# Altium PCB PCB.PcbDoc
Units mm, origin at the board's own origin, x right, y up, seen from the top; angles counter-clockwise.
Board outline 38 x 38 mm, 2 copper layers (Top Layer, Bottom Layer); 22 components, 13 nets, 73 pads, 63 vias.
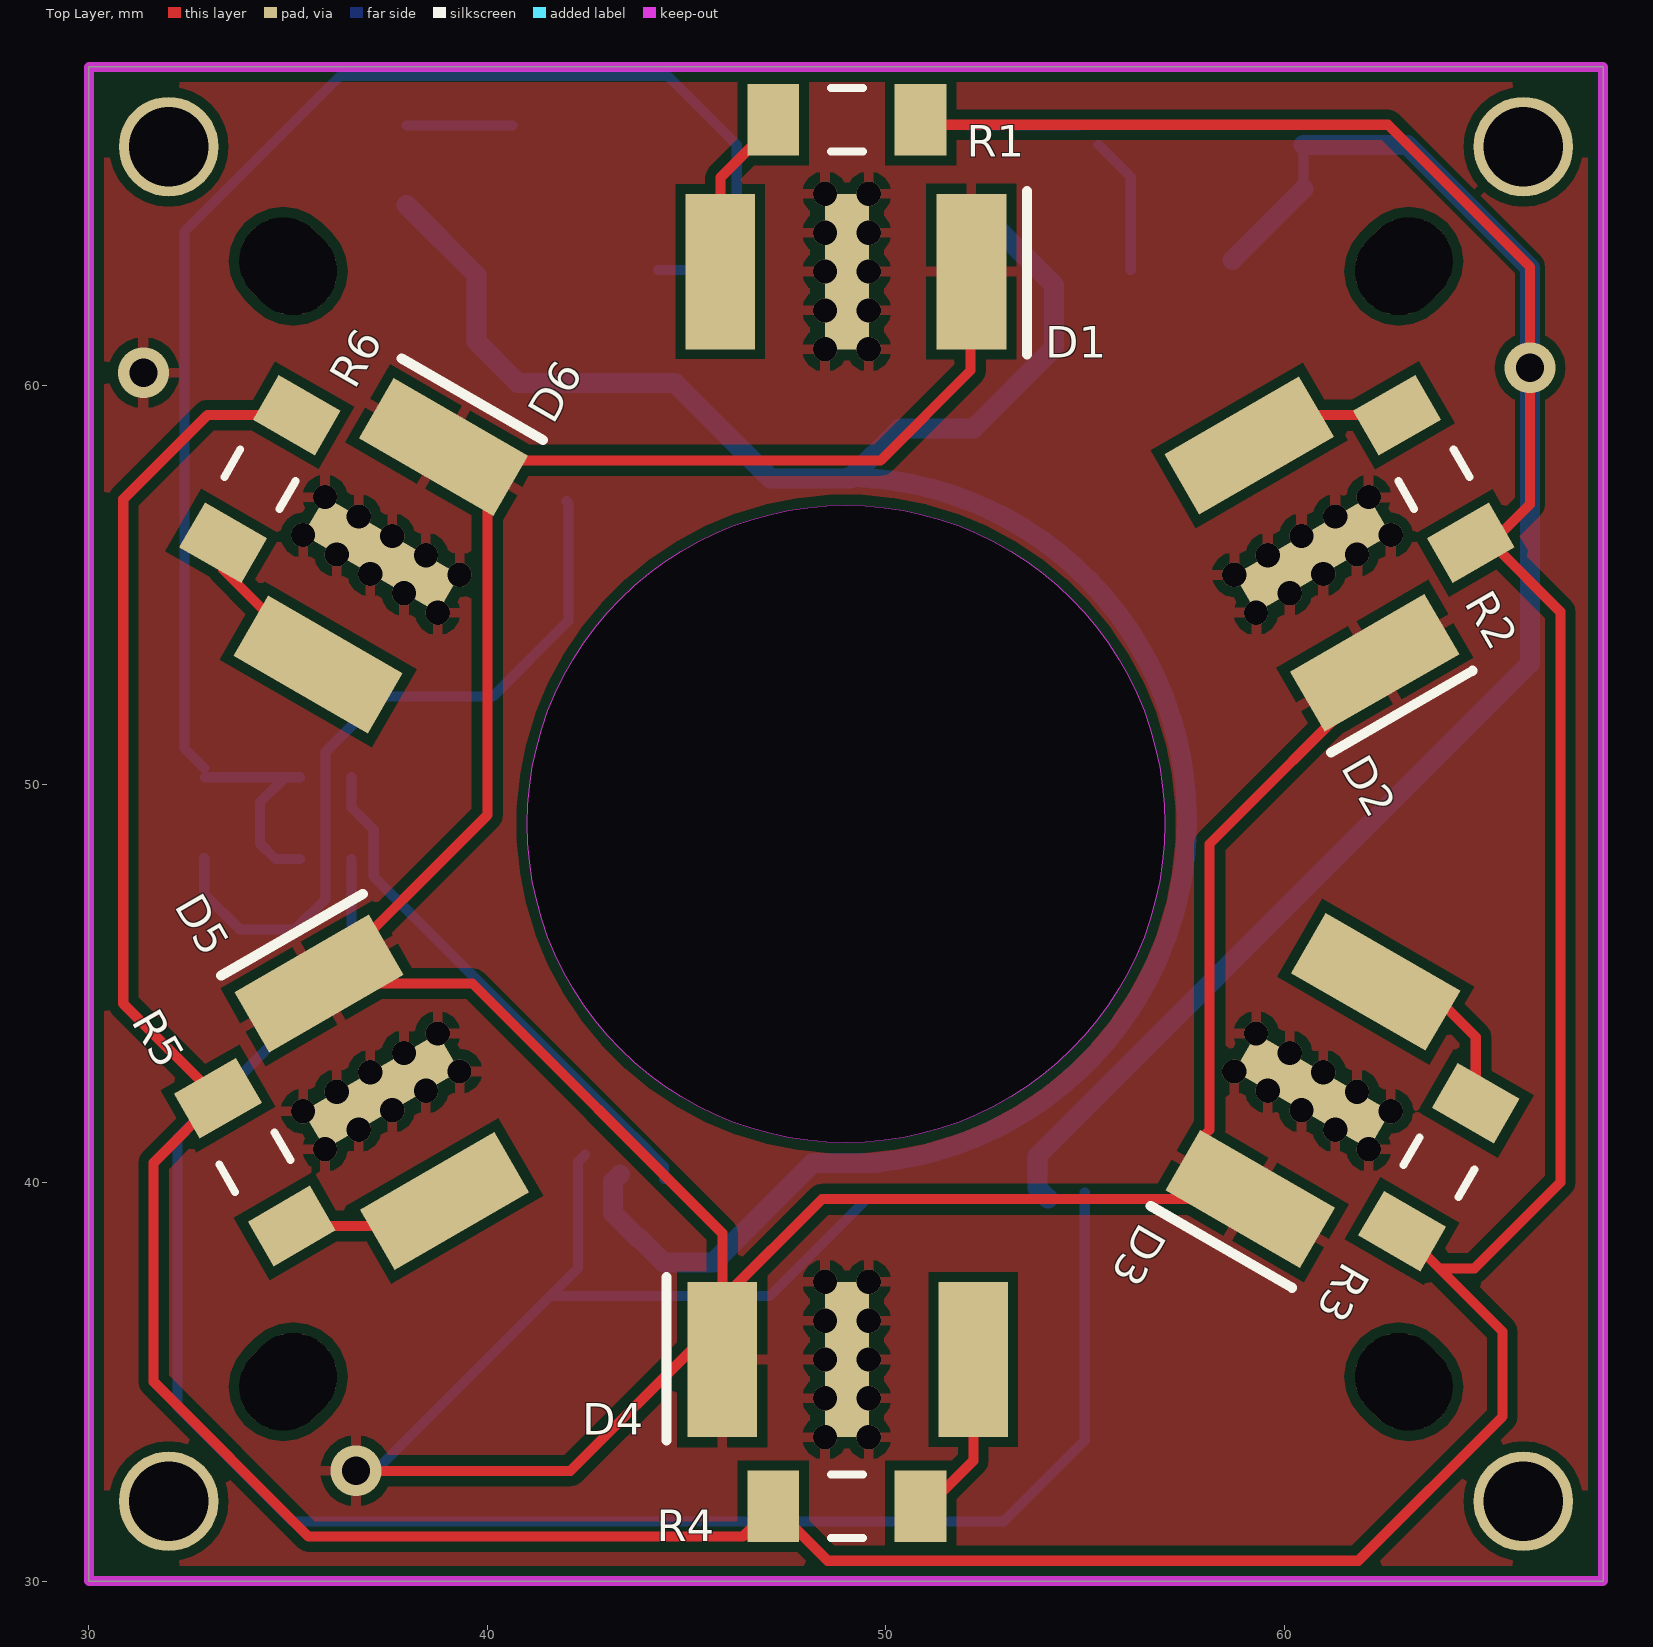
[diagram p0: Top Layer view]
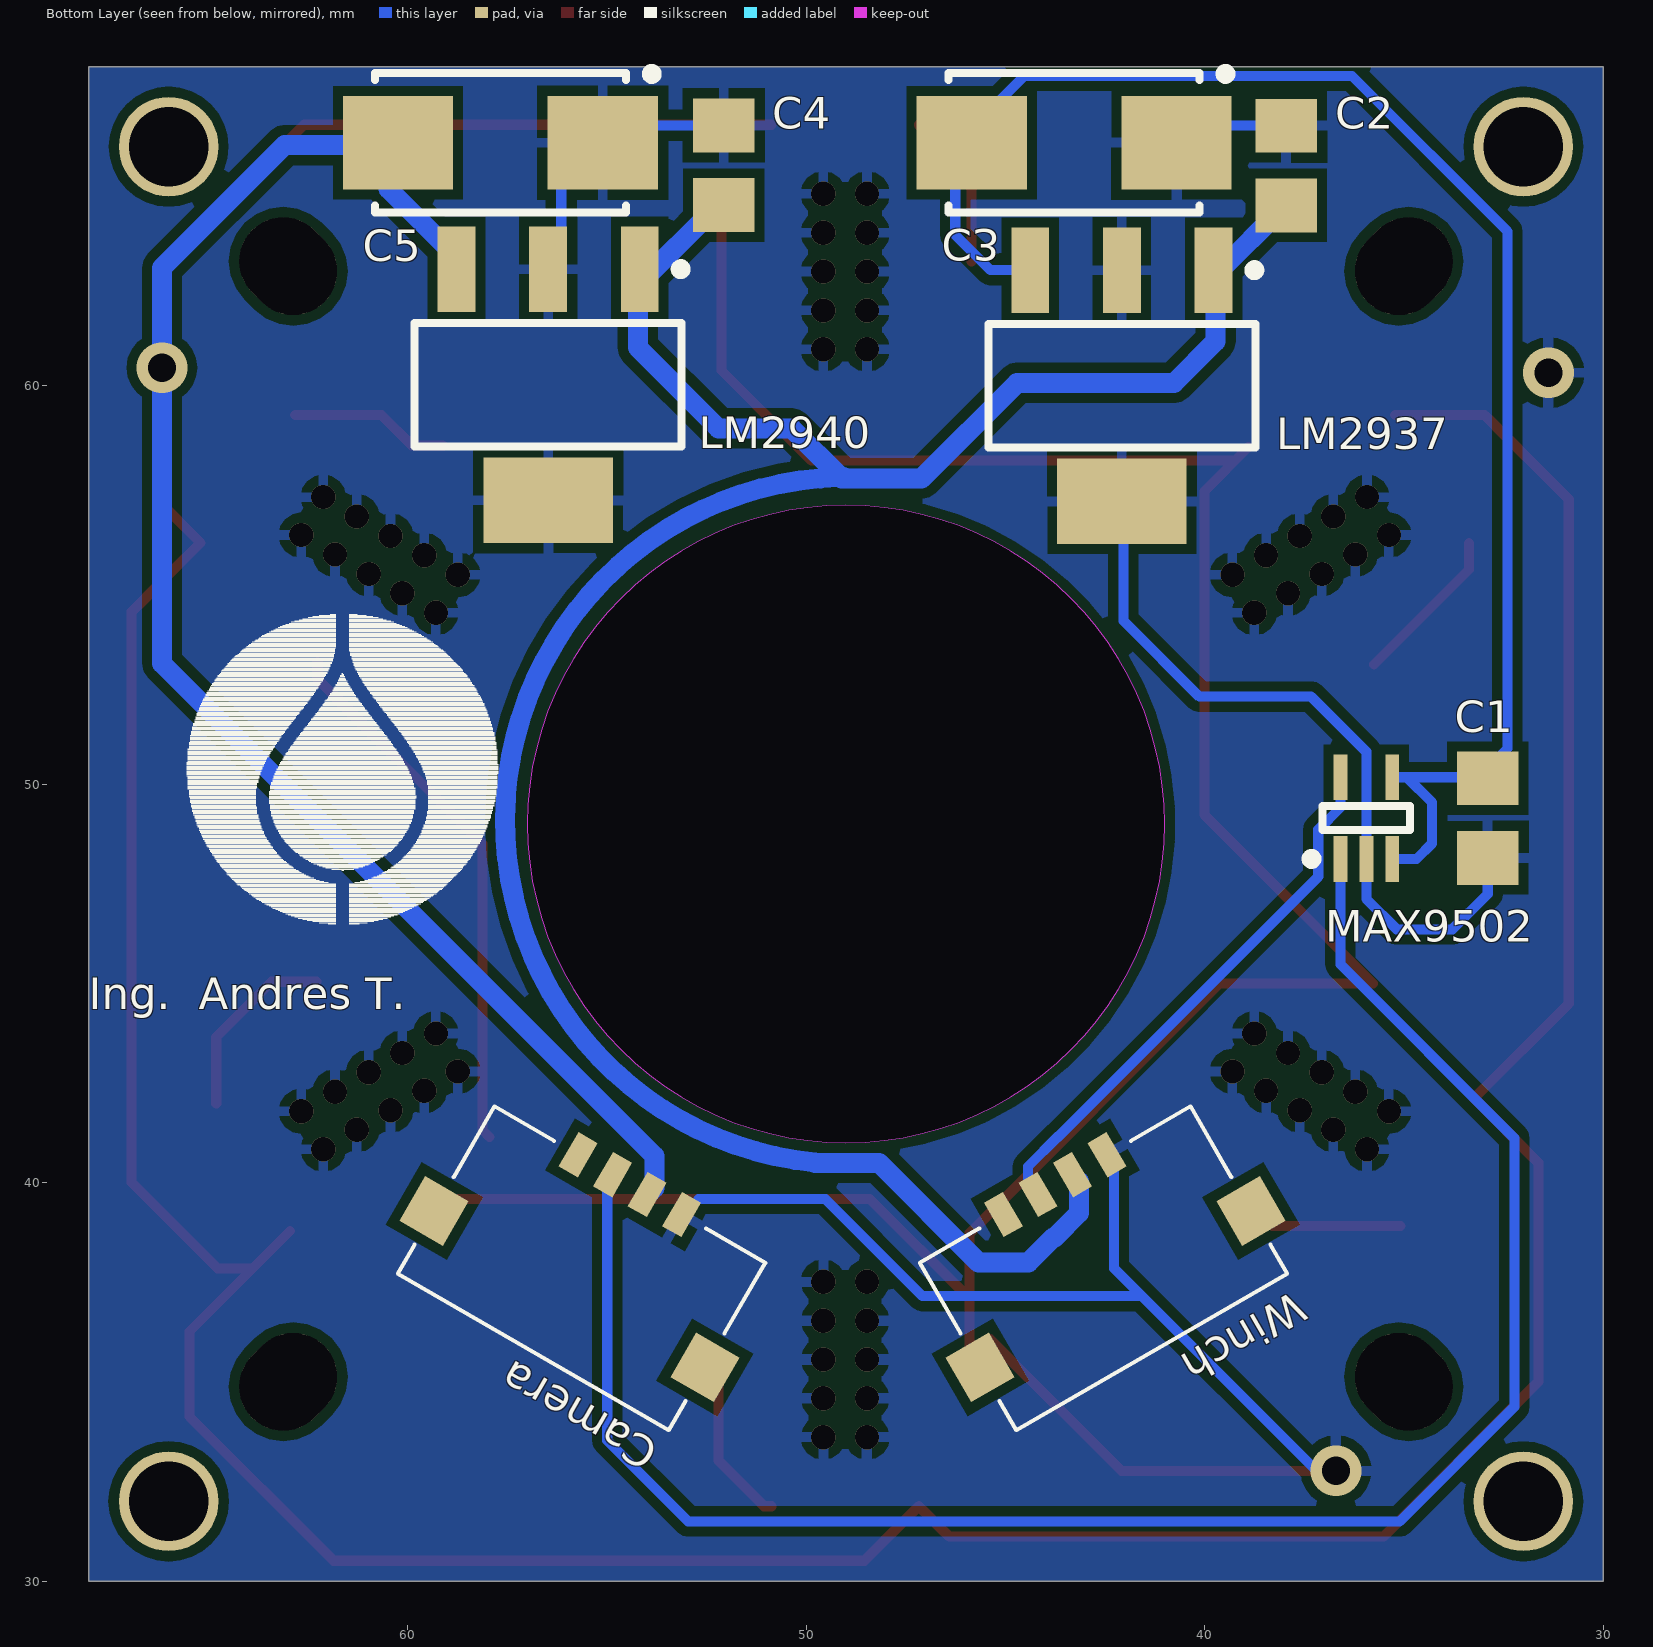
[diagram p1: Bottom Layer view, seen from below]
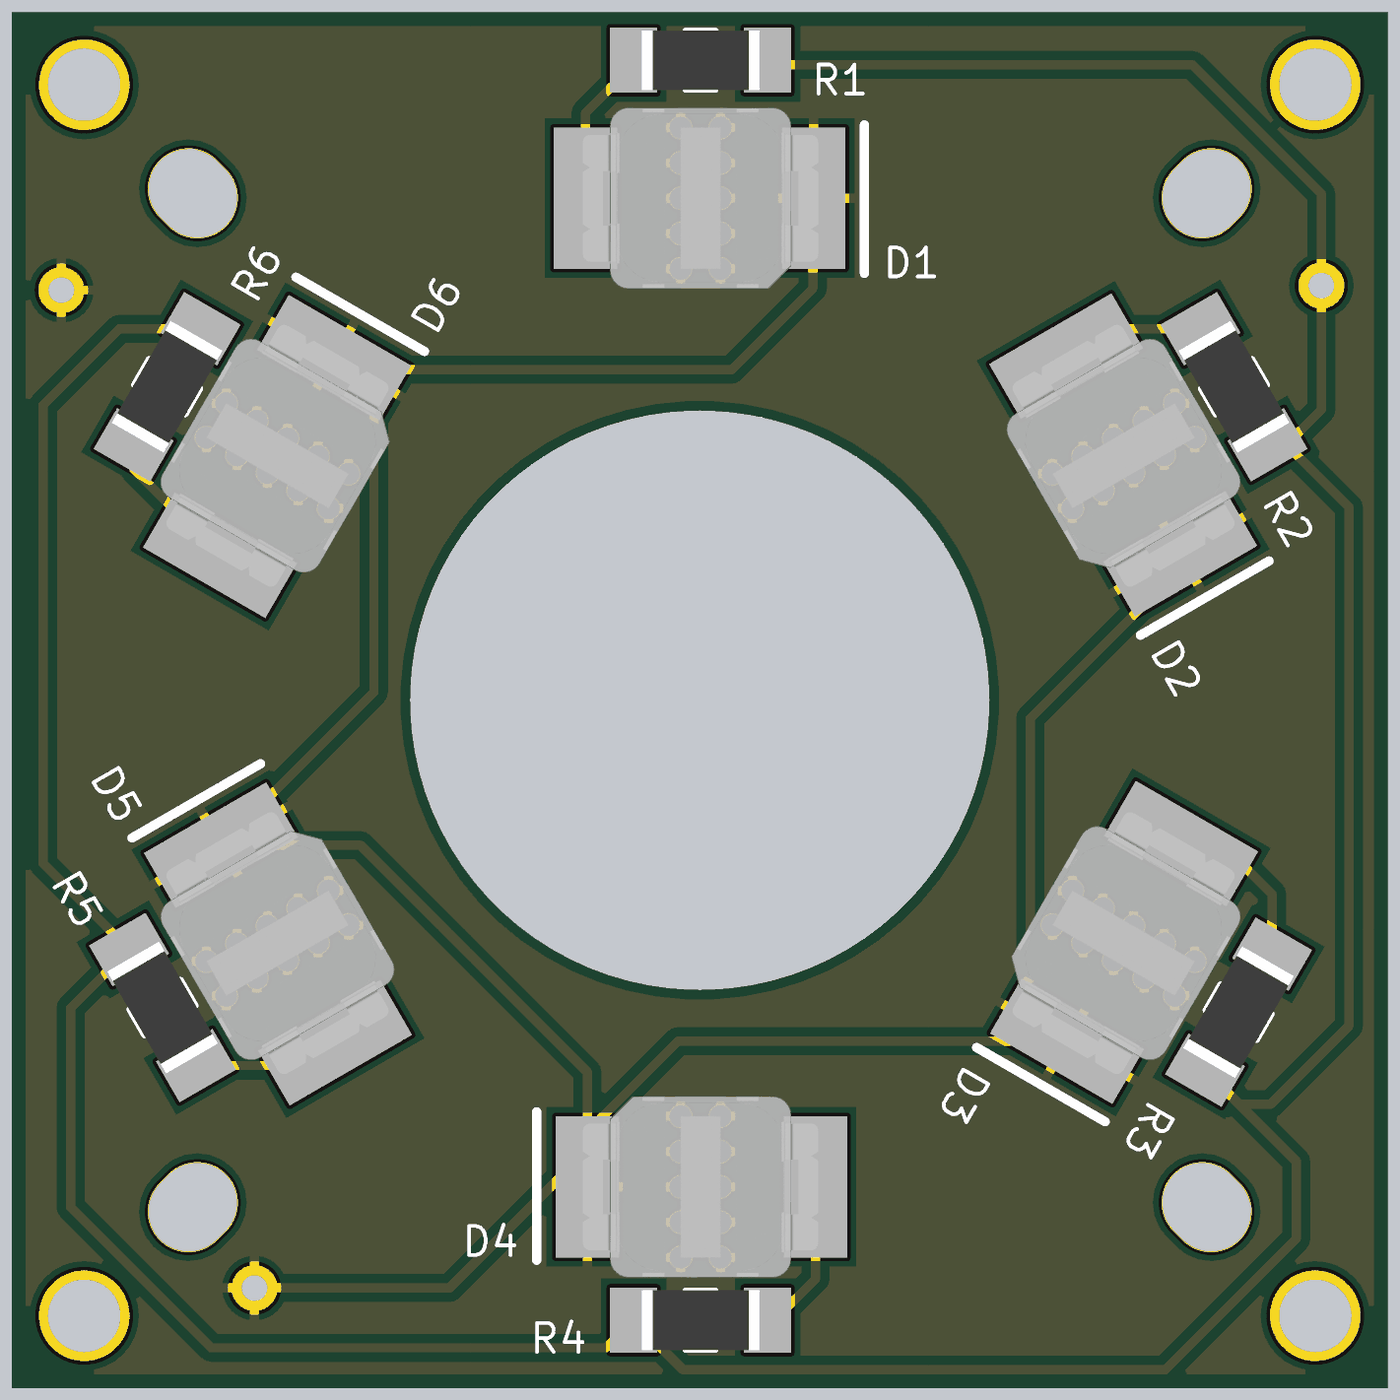
[diagram p2: 3D render of the assembled board from above, using the file's embedded part models]
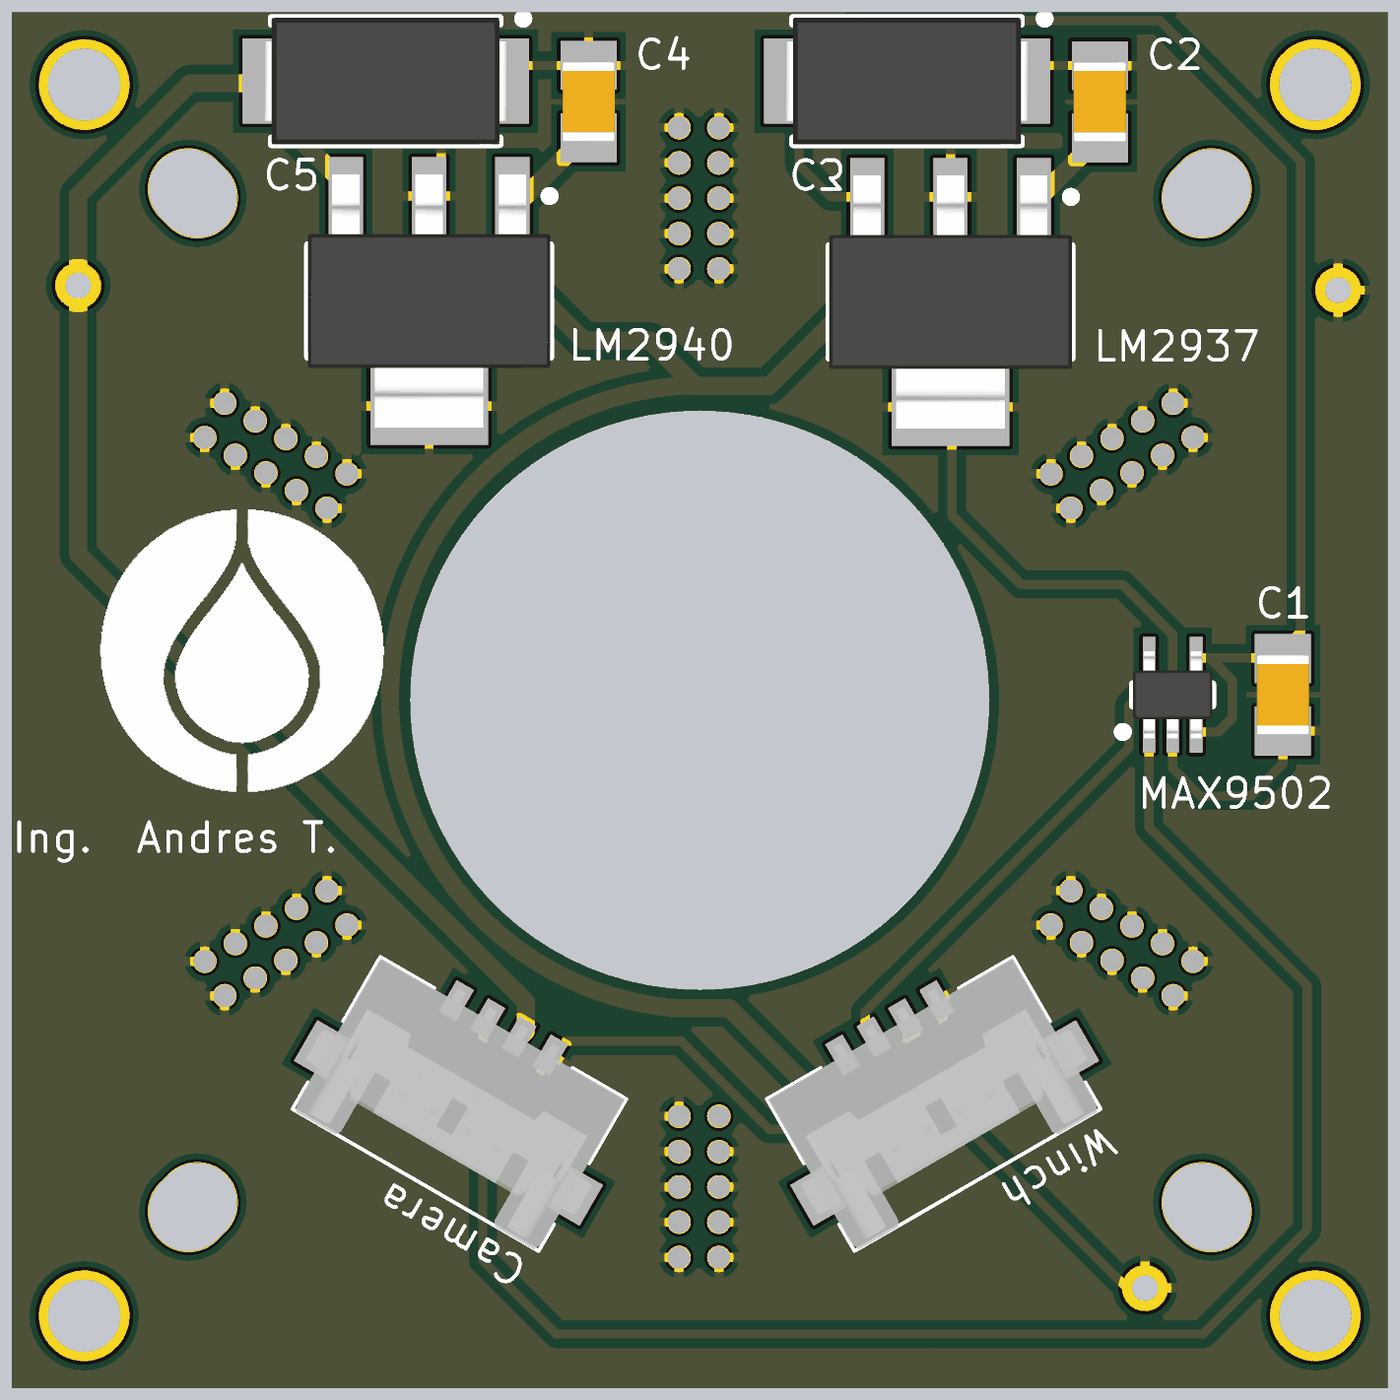
[diagram p3: 3D render of the assembled board from below, using the file's embedded part models]

## Layer stack, top to bottom
Top Solder: solder mask 0.0102, Solder Resist, Dk 3.5
Top Layer: signal copper 0.0356
Dielectric 1: dielectric 0.32, FR-4, Dk 4.8
Bottom Layer: signal copper 0.0356
Bottom Solder: solder mask 0.0102, Solder Resist, Dk 3.5

## Board outline
30,30 30,68 68,68 68,30
cut-out: 49,41 cw(c49,49) 41,49 cw(c49,49) 49,57 cw(c49,49) 57,49 cw(c49,49)

## Design rules (kind name [scope] priority, off if disabled: settings)
Clearance [All] p1: gap=0.254
HoleSize [All] p1: absolutevalues=TRUE maxlimit=2.55 minlimit=0.025 maxpercent=80.000 minpercent=20.000
MinimumSolderMaskSliver MinimumSolderMaskSliver_3 [HasFootprint('MOLEX_4CIRCUITS')] p1: minsoldermaskwidth=0.24
MinimumSolderMaskSliver MinimumSolderMaskSliver_2 [HasFootprint('LED_NeutralWhite - 24mils')] p2: minsoldermaskwidth=0.145
MinimumSolderMaskSliver [HasFootprint('SOT65P210X110-5N')] p3: minsoldermaskwidth=0.095
MinimumSolderMaskSliver MinimumSolderMaskSliver_1 [All] p4: minsoldermaskwidth=0.254
PolygonConnect [All] p1: connectstyle=Relief reliefconductorwidth=0.254 reliefentries=4 polygonreliefangle="90 Angle" airgapwidth=0.254
RoutingVias [All] p1: holewidth=0.711 width=1.27 viastyle="Through Hole" minholewidth=0.711 minwidth=1.27 maxholewidth=0.711 maxwidth=1.27
ShortCircuit [InNet('No Net')] p1: allowed=TRUE
ShortCircuit ShortCircuit_1 [All] p2: allowed=FALSE
SilkToSolderMaskClearance SilkToSolderMaskClearance_3 [HasFootprint('SOT223_LM2940')] p1: minsilkscreentomaskgap=0.073 clearancetoexposedcopper=TRUE
SilkToSolderMaskClearance SilkToSolderMaskClearance_2 [HasFootprint('SOT223127P600-8N')] p2: minsilkscreentomaskgap=0.073 clearancetoexposedcopper=TRUE
SilkToSolderMaskClearance [HasFootprint('SOT65P210X110-5N')] p3: minsilkscreentomaskgap=0 clearancetoexposedcopper=TRUE
SilkToSolderMaskClearance SilkToSolderMaskClearance_1 [All] p4: minsilkscreentomaskgap=0.254 clearancetoexposedcopper=TRUE
SolderMaskExpansion [All] p1: expansion=0.102
Width [All] p1: maxlimit=1.5 minlimit=0.254 preferedwidth=0.254 toplayer_maxwidth=0.5 minimp=50.000000 maximp=50.000000 favimp=50.000000
26 further rules are at their usual default settings.

## Components (designator, comment, footprint, x,y, rotation, side; value= is the part's Value field where it differs from the comment)
C1 "C0805" CAP_KEMET0.1UF 32.893,49.149 r270 bottom
C2 "Cap Pol1" CAP_KEMET 37.95,65.525 r90 bottom
C3 "Cap Pol1" CAPM6032 43.275,66.1 r180 bottom
C4 "Cap Pol1" CAP_KEMET 52.07,65.532 r90 bottom
C5 "Cap Pol1" CAPM6032 57.675,66.1 r180 bottom
Camera "Header 3" MOLEX_4CIRCUITS 54.425,39.95 r30 bottom
D1 "LED3" "LED_NeutralWhite - 24mils" 49.022,62.865 r0 top
D2 "LED3" "LED_NeutralWhite - 24mils" 60.706,55.753 r300 top
D3 "LED3" "LED_NeutralWhite - 24mils" 60.706,42.291 r240 top
D4 "LED3" "LED_NeutralWhite - 24mils" 49.022,35.56 r180 top
D5 "LED3" "LED_NeutralWhite - 24mils" 37.338,42.291 r120 top
D6 "LED3" "LED_NeutralWhite - 24mils" 37.338,55.753 r60 top
LM2937 "LM2937" SOT223127P600-8N 42.075,60 r270 bottom
LM2940 "Voltage Reg" SOT223_LM2940 56.475,60.025 r270 bottom
MAX9502 "MAX9502" SOT65P210X110-5N 35.941,49.149 r90 bottom (schematic designator *)
R1 "Res1" RESC3216 49.022,66.675 r180 top
R2 "Res1" RESC3216 63.754,57.658 r120 top
R3 "Res1" RESC3216 63.881,40.386 r60 top
R4 "Res1" RESC3216 49.022,31.877 r0 top
R5 "Res1" RESC3216 34.163,40.513 r300 top
R6 "Res1" RESC3216 34.29,57.658 r240 top
Winch "Header 4" MOLEX_4CIRCUITS 43.75,39.95 r330 bottom

## Footprints (in the part's own frame and the unit in brackets; to place one, negate y for a bottom-side part, rotate by r counter-clockwise, add the part's x,y. Pads: shape width x height; smd on the part's side, far side on the other; paste and mask are expansions set on the pad)
CAP_KEMET [mm] "0.1uF, 0.47 uF"
  rect 1.35x1.55 smd: 1(-1,0) 2(1,0)
  body extent -1.1,-0.72 1.1,0.72, height 0.9
CAP_KEMET0.1UF [mm]
  rect 1.35x1.55 smd: 1(-1,0) 2(1,0)
  body extent -1.1,-0.72 1.1,0.72, height 0.9
CAPM6032 [mm]
  rect 2.77x2.35 smd: 1(-2.57,0) 2(2.57,0)
  silkscreen extent -3.15,-1.75 3.92,1.85, body extent -3.37,-1.75 3.37,1.75, height 2.8
"LED_NeutralWhite - 24mils" [mm] "LED XLAMP NEUTRAL WHT 4000K 2SMD"
  rect 1.75x3.9 smd: 1(-3.175,0) 2(3.125,0)
  rect 1.1x3.9 smd: ""(0,0)
  silkscreen extent 4.52,-2.08 4.52,2.02, body extent -3.25,-2.5 3.25,2.5, height 1.35
MOLEX_4CIRCUITS [mm]
  rect 0.55x1 smd: 1(1.5,0) 2(0.5,0) 3(-0.5,0) 4(-1.5,0)
  rect 1.26x1.3 smd: ""(-3.925,3.03) ""(3.925,3.03)
  silkscreen extent -3.93,0 3.93,4.85, body extent -4.3,-0.31 4.3,4.88, height 1.48
RESC3216 [mm] "Chip Resistor, 2-Leads, Body 3.13x1.55mm, IPC Medium Density"
  rect 1.3x1.8 smd: 1(-1.85,0) 2(1.85,0)
  silkscreen extent -0.4,-0.8 0.4,0.8, body extent -1.63,-0.82 1.63,0.82, height 0.7
SOT65P210X110-5N [mm] "SOT23, 5-Leads, Body 2,00x2,10mm, Pitch 0,65mm, IPC Medium Density"
  rect 1.15x0.35 smd: 1(-1.025,0.65) 2(-1.025,0) 3(-1.025,-0.65) 4(1.025,-0.65) 5(1.025,0.65)
  silkscreen extent -1.15,-1.1 0.3,1.5, body extent -1.2,-1.1 1.2,1.1, height 1.1
SOT223_LM2940 [mm] "SOT223, 4-Leads, Body 6.50x7.00mm (avg), Pitch 2.30mm, IPC Medium Density"
  rect 2.15x0.95 smd: 1(-2.9,2.3) 2(-2.9,0) 3(-2.9,-2.3)
  rect 2.15x3.25 smd: 4(2.9,0)
  silkscreen extent -3.02,-3.35 1.55,3.45, body extent -3.5,-3.35 3.5,3.35, height 1.8
SOT223127P600-8N [mm] "LM2937"
  rect 2.15x0.95 smd: 1(-2.9,2.3) 2(-2.9,0) 3(-2.9,-2.3)
  rect 2.15x3.25 smd: 4(2.9,0)
  silkscreen extent -3.02,-3.35 1.55,3.45, body extent -3.5,-3.35 3.5,3.35, height 1.7

## Part data
C1: "Ceramic Chip Capacitor - Standard"
C2 C3 C4 C5: "Polarized Capacitor (Radial)"
Camera: library part "Header 4", "Header, 4-Pin"
D1 D2 D3 D4 D5 D6: "Typical BLUE SiC LED"
LM2937: library part LM1117
R1 R2 R3 R4 R5 R6: "Resistor"
Winch: "Header, 4-Pin"

## Free pads (board coordinates)
  round 2.5 hole 2: 0(32,32) 0(32,66) 0(66,32) 0(66,66)
  oval 2.55x2.2 hole 2.2 slot 2.55 at 45 deg rot 45: ""(35,35) ""(63,63)
  oval 2.55x2.2 hole 2.2 slot 2.55 at 135 deg rot 135: ""(35,63) ""(63,35)

## Via types
v1: diameter 0.61, hole 0.61, Top Layer to Bottom Layer, 60 vias
v2: diameter 1.27, hole 0.711, Top Layer to Bottom Layer, 3 vias

## Nets (pads, with @x,y where several pads share a name; then routed paths per layer and width w, separated by ;. In a path a pad name is that pad's centre, name@x,y a point inside that pad or via, vN(x,y) a via of type N, cw(c..) or ccw(c..) an arc to the next point about the centre after c; other vN are vias at no path point)
GND: C1.2 C2.2 C3.2 C4.2 C5.2 Camera.4 D1. D1.2 D2. D2.2 D3. D3.2 D4. D4.2 D5. D5.2 D6. D6.2 LM2937.2 LM2937.4 LM2940.2 LM2940.4 MAX9502.2 Winch.4 | length 139.2
  Top Layer w0.254: v2(36.703,32.766) 42.087,32.766 45.389,36.068 D4.2 D4.2@45.897,37.084 ; D1.2@52.125,64.588 52.125,60.38 49.87,58.125 39.235,58.125 D6.2 40,57.36 40,49.222 D5.2 39.628,44.997 45.897,38.728 D4.2@45.897,37.084 ; D3.2@57.95,41.147 58.125,41.322 58.125,48.5 62.269,52.644 D2.2 ; D3.2 48.398,39.585 D4.2@45.897,37.084
  Bottom Layer w0.254: C1.2 32.893,47.244 33.782,46.355 35.179,46.355 35.941,47.117 MAX9502.2 35.941,50.813 37.325,52.197 40.132,52.197 42.037,54.102 42.037,57.044 LM2937.4@41.981,57.1 ; v2(36.703,32.766) 37.191,32.766 42.275,37.85 42.275,40.524 Winch.4 ; C2.2@37.973,66.532 C3.2@40.626,66.532 ; 41.675,37.15 47.08,37.15 49.52,39.59 52.701,39.59 ; C4.2 C5.2@54.85,66.532 ; C5.2@55.342,66.04 56.146,65.236 LM2940.2@56.146,62.9
  other v1: 48.472,33.61 49.572,33.61 48.472,34.585 49.572,34.585 48.472,35.56 49.572,35.56 48.472,36.535 49.572,36.535 48.472,37.51 49.572,37.51 35.924,40.84 62.12,40.84 36.769,41.327 61.275,41.327 35.374,41.792 62.67,41.792 37.613,41.815 60.431,41.815 36.219,42.28 38.457,42.302 59.587,42.302 61.825,42.28 37.063,42.767 60.981,42.767 39.302,42.79 58.742,42.79 37.907,43.255 60.137,43.255 38.752,43.742 59.292,43.742 38.752,54.302 59.292,54.302 37.907,54.789 60.137,54.789 39.302,55.254 58.742,55.254 37.063,55.277 60.981,55.277 36.219,55.764 38.457,55.742 59.587,55.742 61.825,55.764 37.613,56.229 60.431,56.229 35.374,56.252 62.67,56.252 36.769,56.717 61.275,56.717 35.924,57.204 62.12,57.204 48.472,60.915 49.572,60.915 48.472,61.89 49.572,61.89 48.472,62.865 49.572,62.865 48.472,63.84 49.572,63.84 48.472,64.815 49.572,64.815
  other v2: 31.369,60.325
NetD1_1: D1.1 R1.2 | length 4
  Top Layer w0.254: D1.1@45.847,63.119 45.847,65.223 R1.2@47.172,66.548
NetD2_1: D2.1 R2.2 | length 4
  Top Layer w0.254: D2.1 59.9,58.503 60.657,59.26 R2.2
NetD3_1: D3.1 R3.2 | length 4.8
  Top Layer w0.254: D3.1 63.417,45.041 64.806,43.652 R3.2
NetD4_1: D4.1 R4.2 | length 4.3
  Top Layer w0.254: R4.2 51.054,31.877 52.197,33.02 D4.1
NetD5_1: D5.1 R5.2 | length 3.2
  Top Layer w0.254: R5.2 D5.1@38.295,38.911
NetD6_1: D6.1 R6.2 | length 4
  Top Layer w0.254: R6.2 33.365,55.389 D6.1
Thermal: 
VCC_3.3V: C1.1 C3.1 LM2937.3 MAX9502.3 MAX9502.4 | length 39.9
  Bottom Layer w0.254: C1.1@32.893,50.403 32.4,50.896 32.4,63.875 36.3,67.775 44.523,67.775 46.258,66.04 46.258,63.784 45.374,62.9 LM2937.3@44.281,62.9 ; C1.1@32.918,50.174 34.925,50.174 ; MAX9502.3 34.68,48.124 34.29,48.514 34.29,49.539 34.925,50.174 ; MAX9502.4 34.925,50.174
VCC_12V: C5.1 Camera.3 LM2940.3 R1.1 R2.1 R3.1 R4.1 R5.1 R6.1 | length 157.9
  Top Layer w0.254: R6.1 32.971,59.26 30.861,57.15 30.861,44.492 R5.1 31.623,40.5 31.623,35.002 35.51,31.115 46.41,31.115 R4.1 48.541,30.508 61.858,30.508 65.475,34.125 65.475,36.265 R3.1 63.894,37.846 64.77,37.846 66.929,40.005 66.929,54.327 65.2,56.056 66.167,57.023 v2(66.167,60.452) 66.167,62.983 62.602,66.548 R1.1@50.872,66.548
  Bottom Layer w0.254: C5.1@60.482,64.936 C5.1@60.482,66.04
  Bottom Layer w0.5: Camera.3@54.067,39.6 53.805,39.862 53.805,40.668 66.167,53.03 v2(66.167,60.452) 66.167,62.958 63.085,66.04 C5.1@60.482,66.04 ; LM2940.3@58.698,63.152 C5.1@60.482,64.936
VCC_IN: C2.1 C4.1 LM2937.1 LM2940.1 Winch.3 | length 61.2
  Bottom Layer w0.32: 49.023,57.635 cw(c48.938,49.085) 49.066,57.635
  Bottom Layer w0.5: C2.1@37.973,64.532 39.725,62.78 39.725,61.113 40.767,60.071 44.704,60.071 47.1,57.675 49.106,57.675 50.359,58.928 52.197,58.928 54.225,60.956 54.225,62.521 C4.1@52.214,64.532 ; Winch.3@43.325,40.2 43.15,40.025 43.15,39.237 43.761,38.625 43.798,38.625 44.423,38 45.679,38 48.175,40.496 49.774,40.496 ; 49.067,57.705 cw(c48.938,49.085) 49.134,57.703 cw(c48.938,49.085) 49.774,40.506
VIN_VIDEO: MAX9502.5 Winch.2 | length 13.3
  Bottom Layer w0.254: MAX9502.5 36.591,49.413 37.147,48.857 37.147,47.678 43.673,41.152 43.688,41.152 44.433,40.406 Winch.2@44.433,40.09
VOUT_VIDEO: Camera.2 MAX9502.1 | length 46.6
  Bottom Layer w0.254: MAX9502.1 36.591,45.481 32.225,41.115 32.225,34.375 35.104,31.496 52.959,31.496 54.991,33.528 Camera.2@54.991,39.751
pads on no net: Camera. Camera.1 Winch. Winch.1

## Polygon pours and split planes (outlines as drawn)
GND on Bottom Layer "Bottom Layer" (solid, pour order 12): 30,68 68,68 68,30 30,30
GND on Top Layer "Top Layer" (solid, pour order 14): 30,68 68,68 68,30 30,30

## Keep-outs
Top Layer:
  lines w0.254: 132.842,117.221 133.096,116.967 ; 30,30 30,68 68,68 68,30 30,30

## Silkscreen, mask and mechanical layers (free items; w line width, h text height)
Bottom Overlay:
  drawing of 736 lines, arcs and shapes, not listed
  text "Ing.  Andres T." at 68,44.35 h0.8